# Altium PCB PCI short card universal - 32 BIT.PCBDOC (part 1 of 4)
Units mm, origin at the board's own origin, x right, y up, seen from the top; angles counter-clockwise.
Board outline 174.62 x 106.68 mm, 4 copper layers (TopLayer, MidLayer2, MidLayer3, BottomLayer); 200 components, 306 nets, 1120 pads, 510 vias.
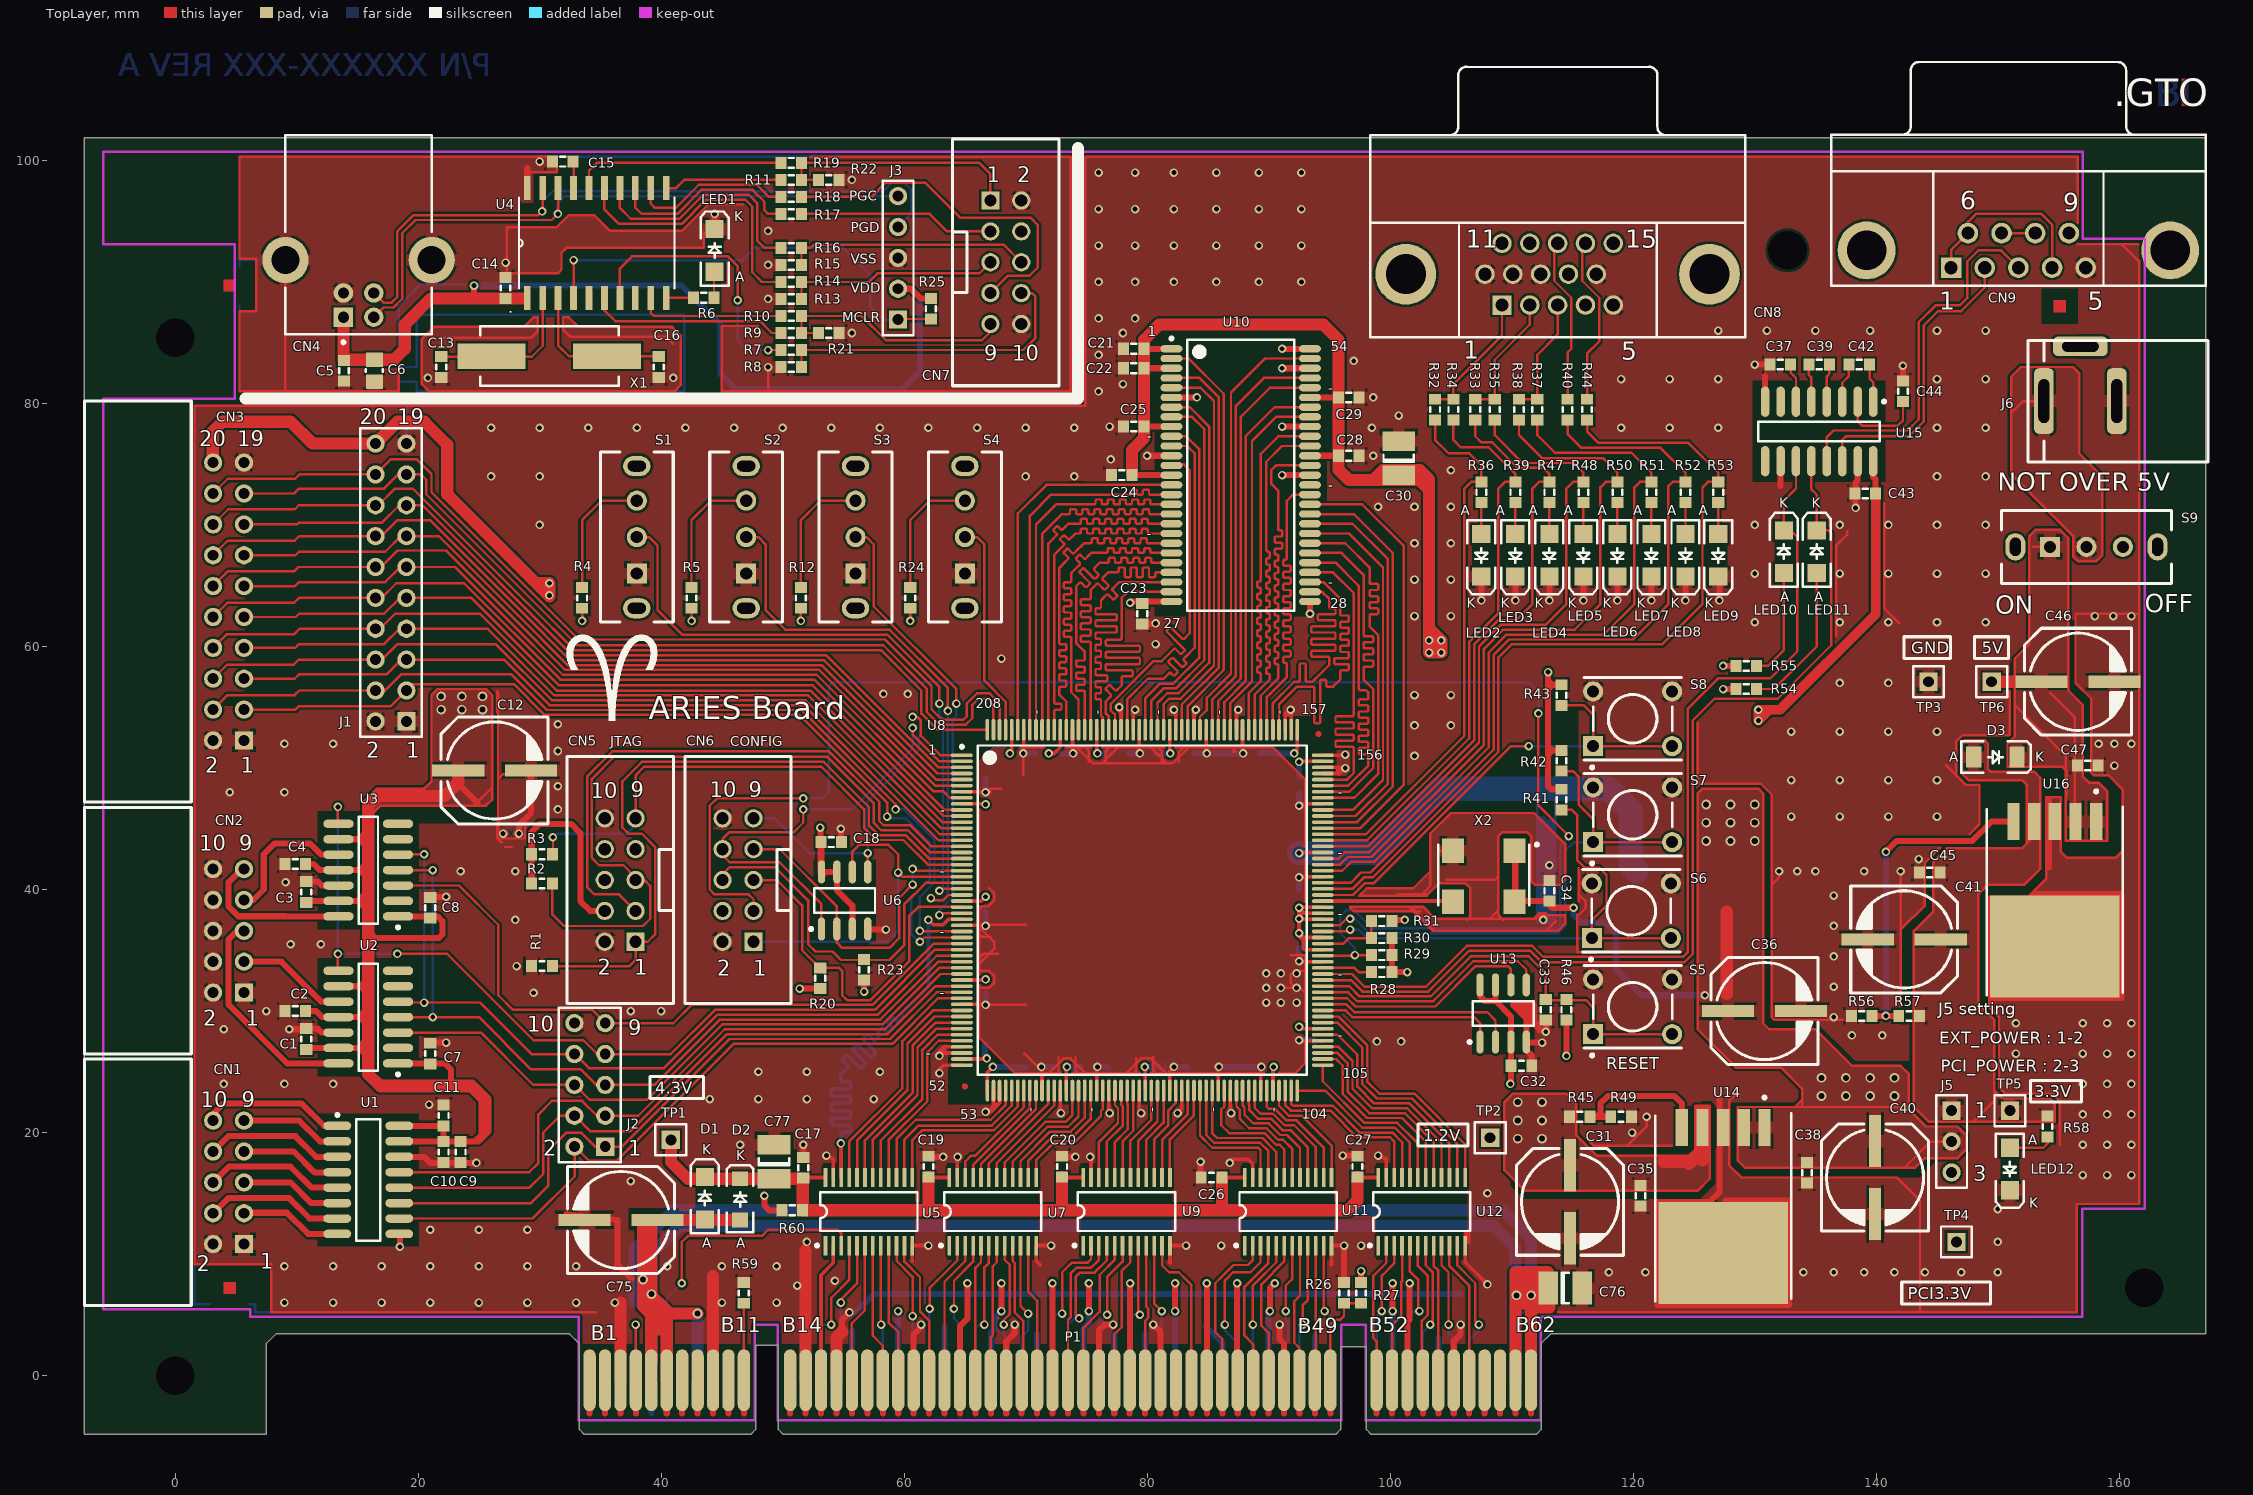
[diagram p0: TopLayer view]
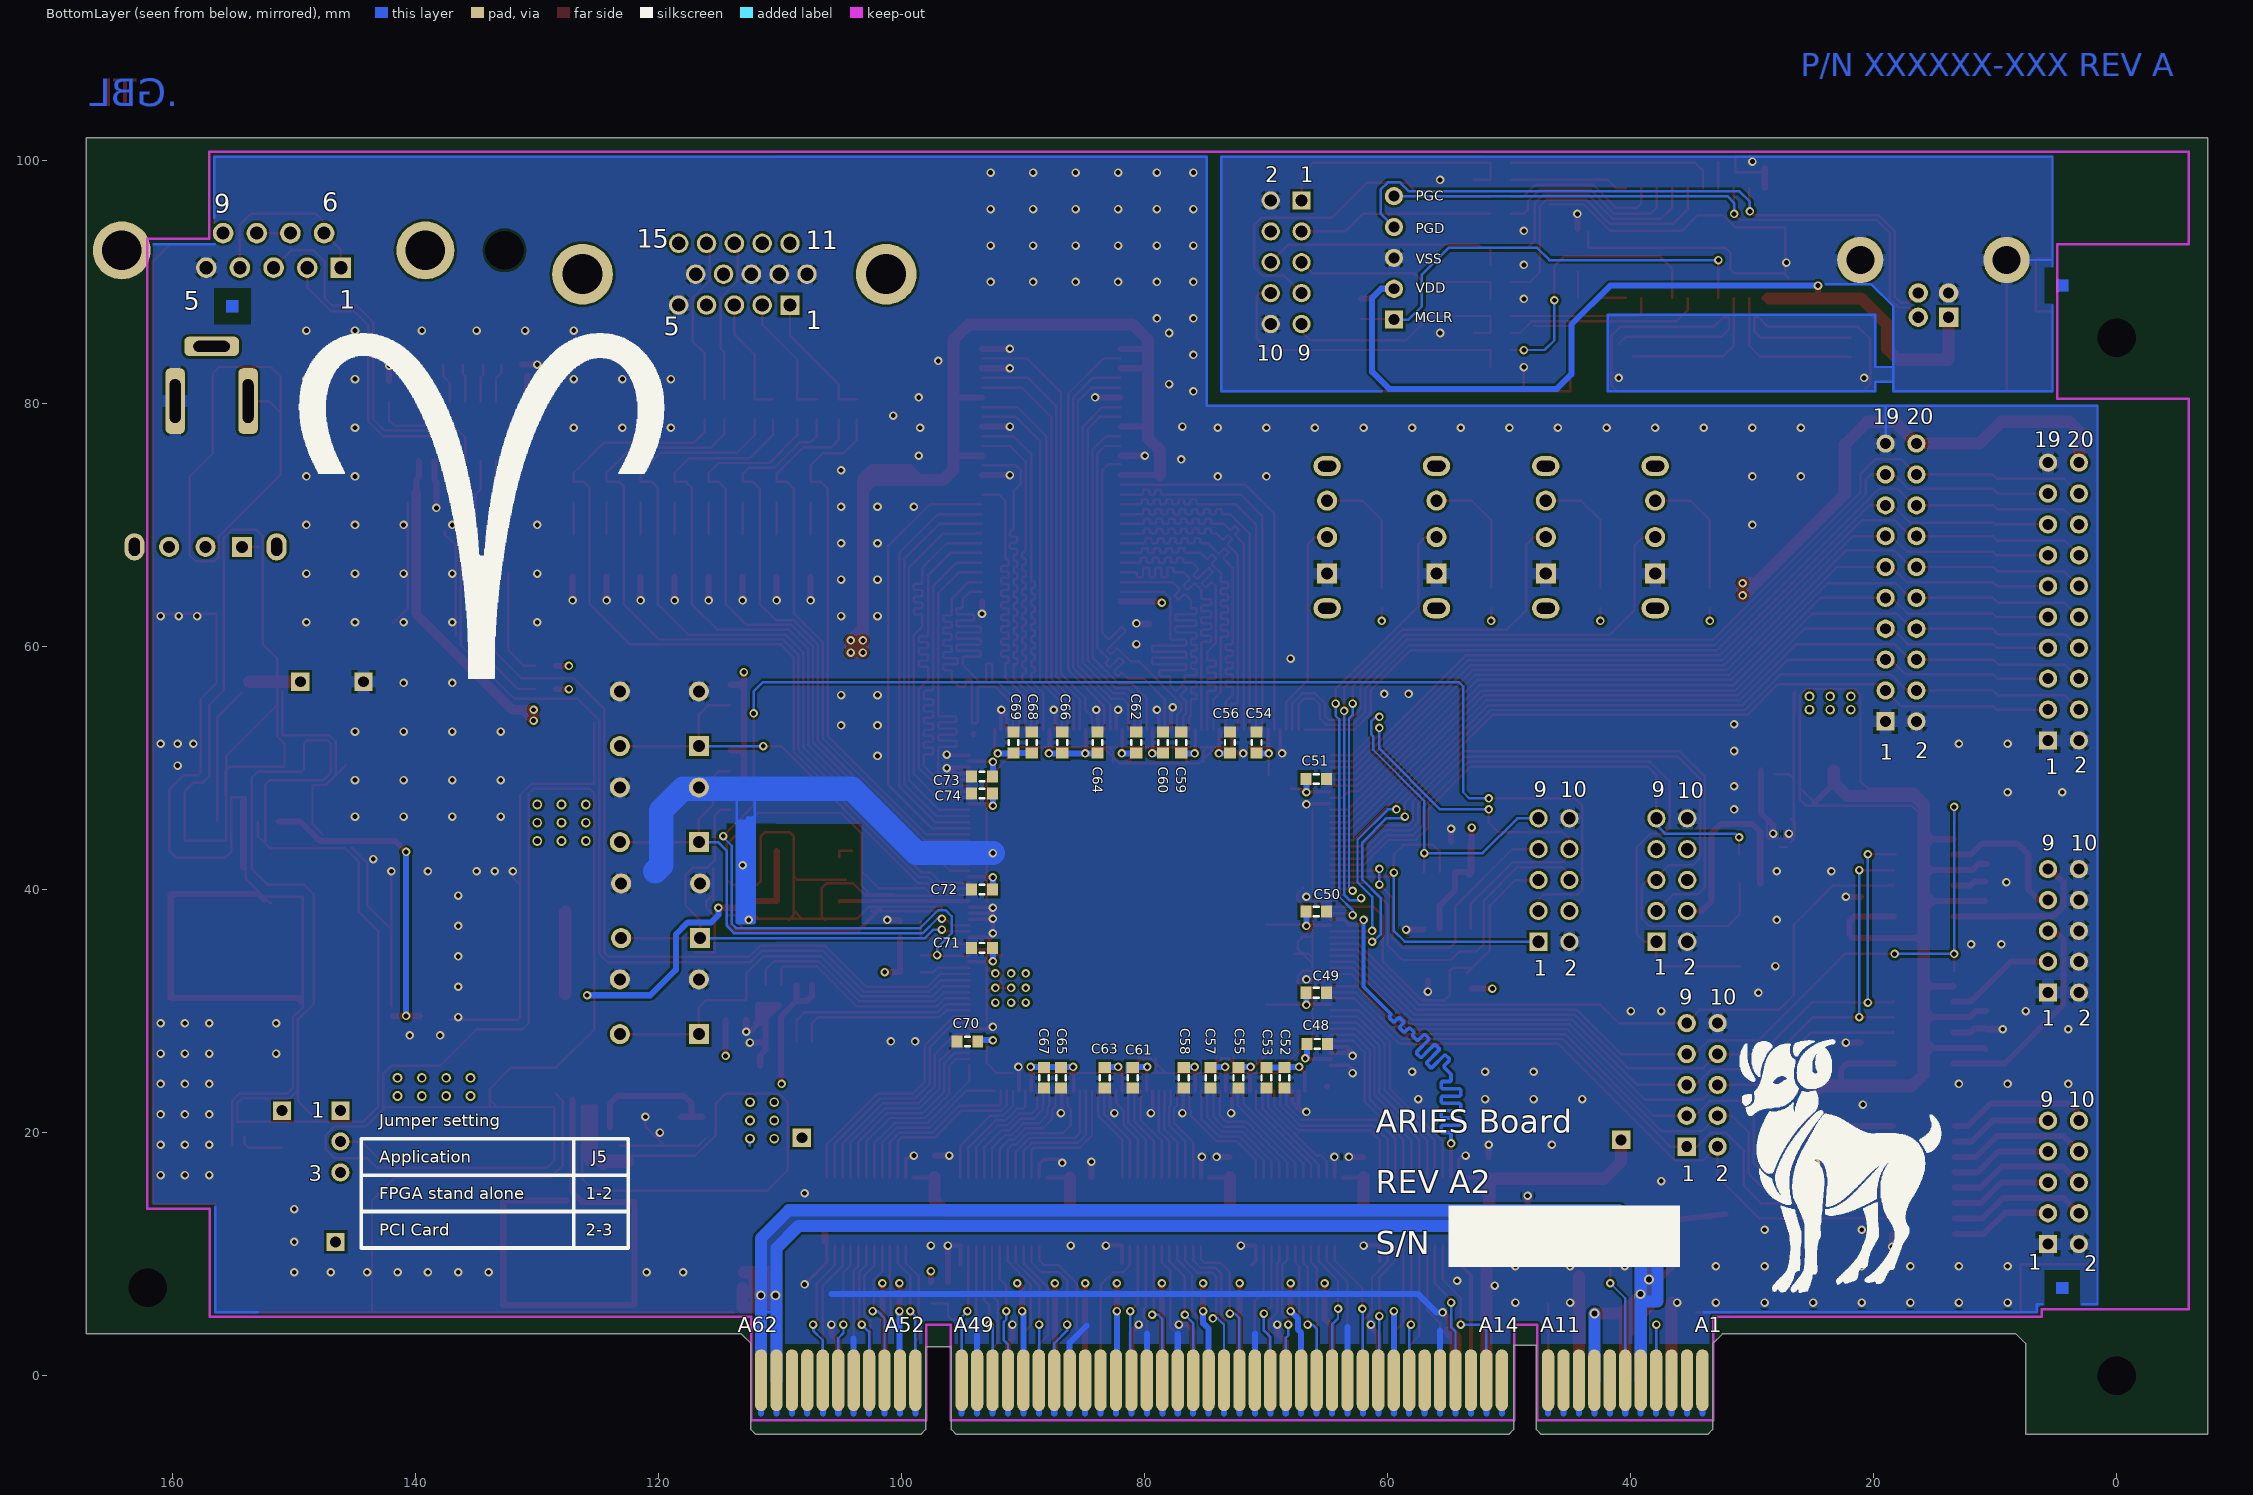
[diagram p1: BottomLayer view, seen from below]
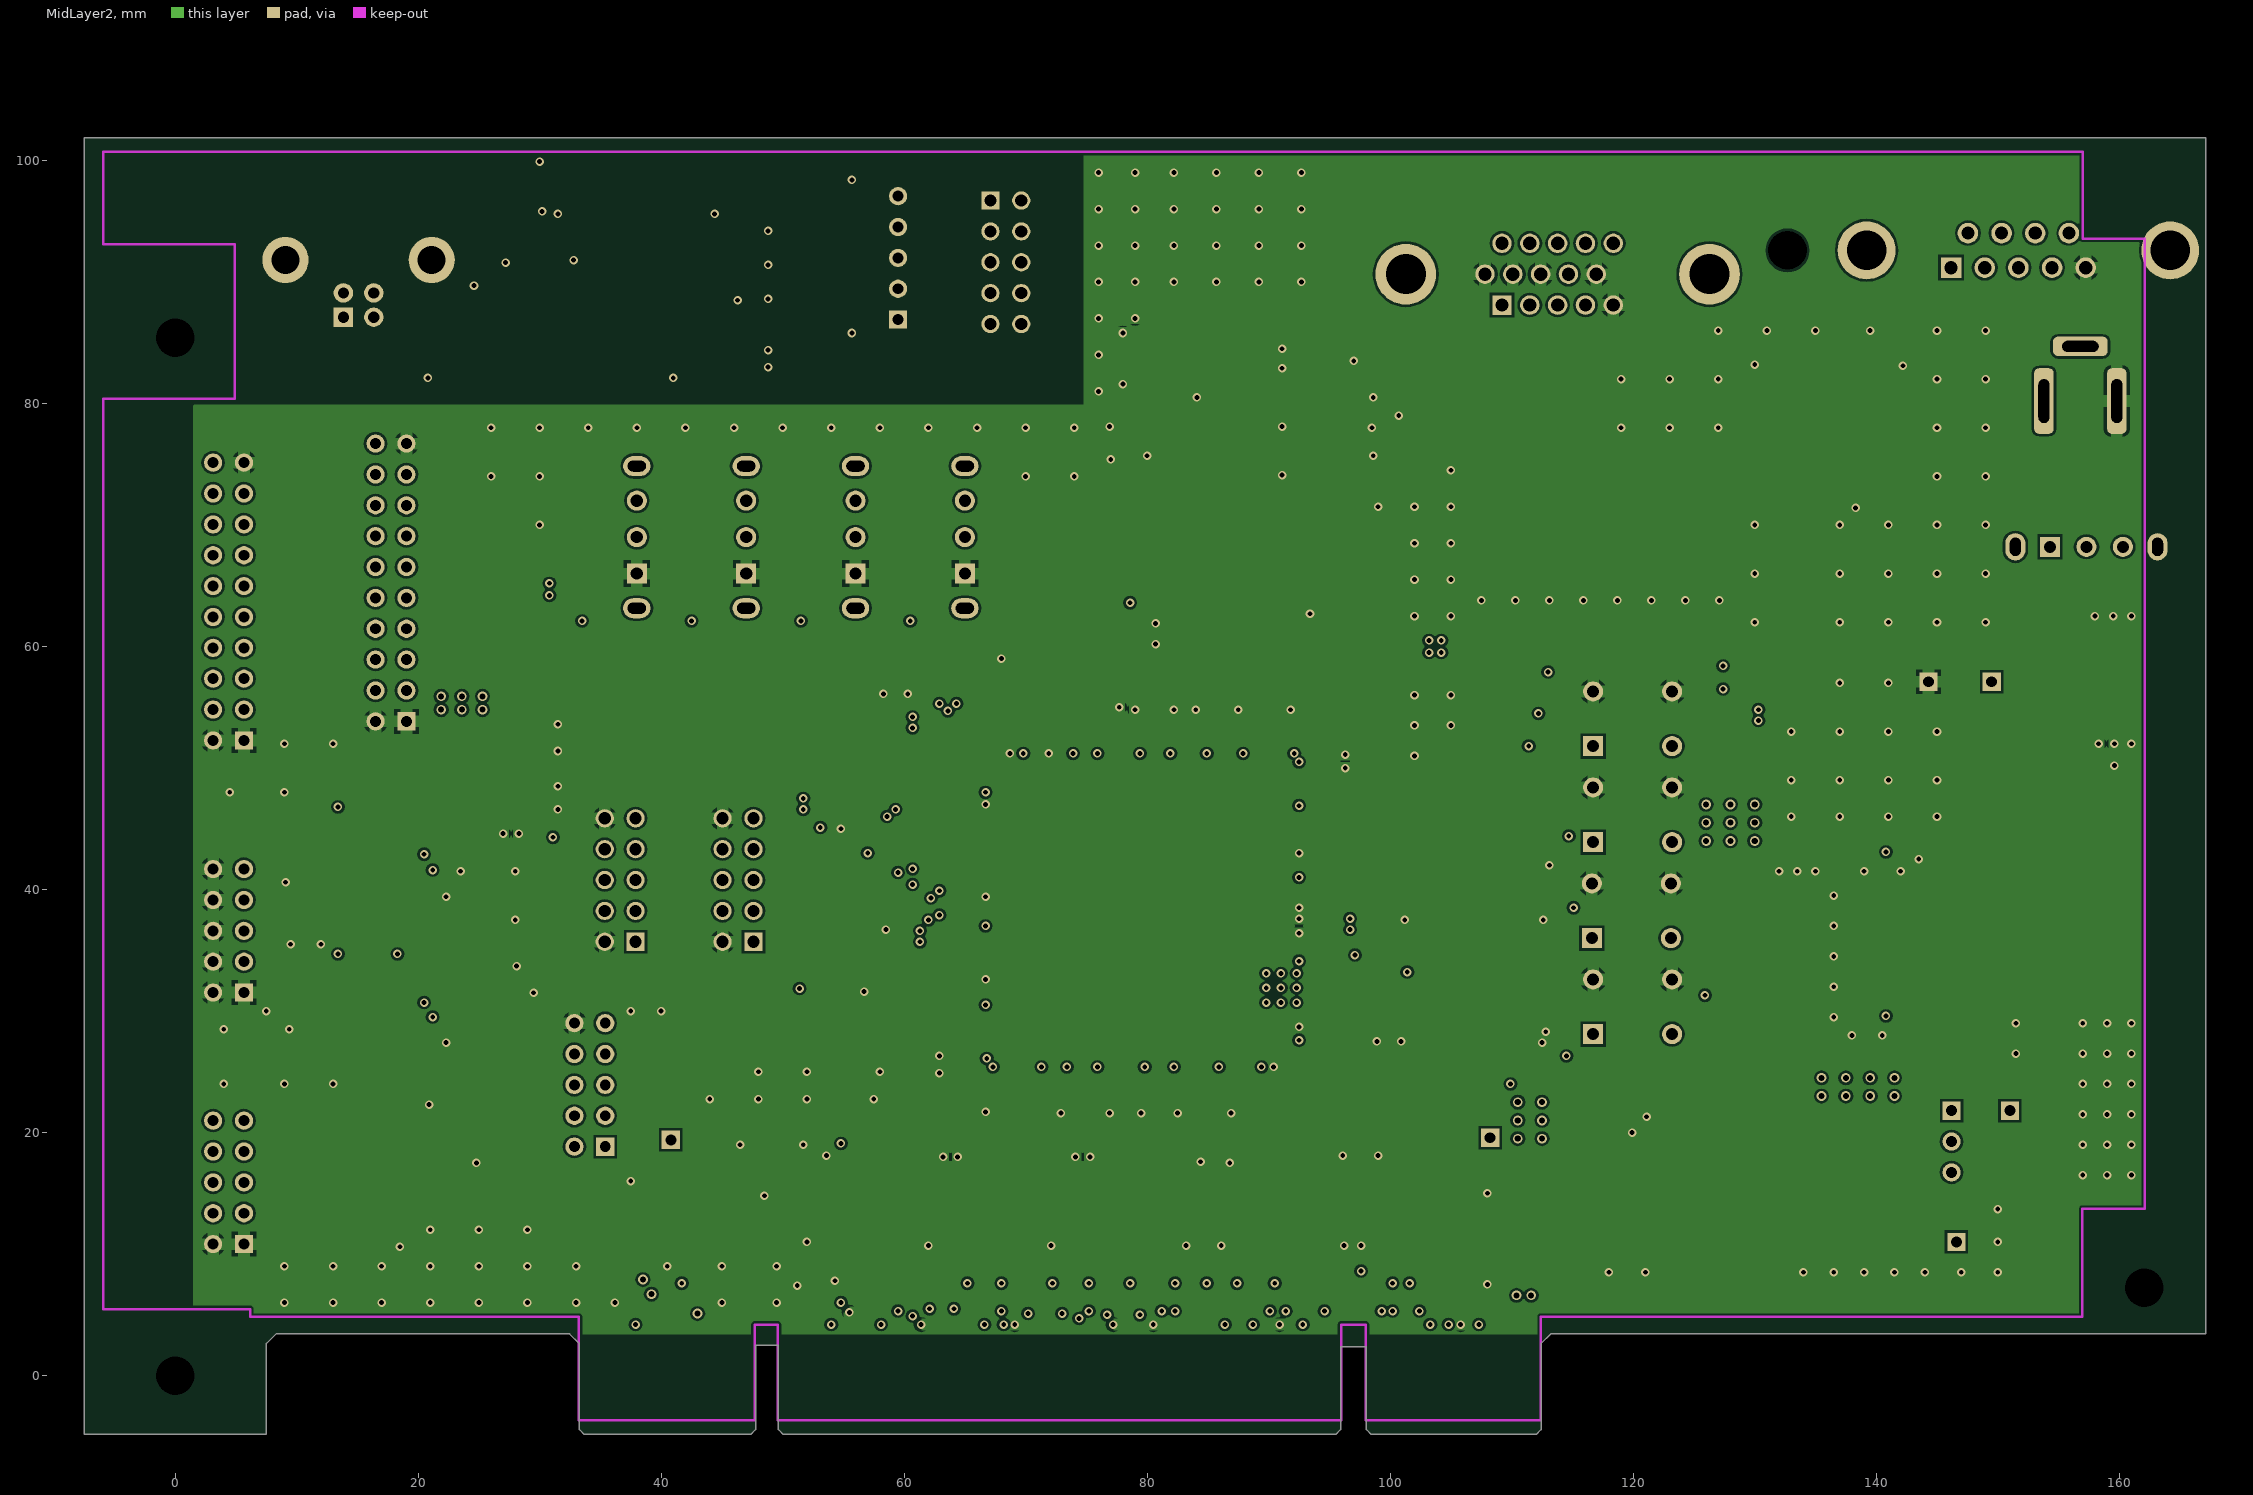
[diagram p2: MidLayer2]
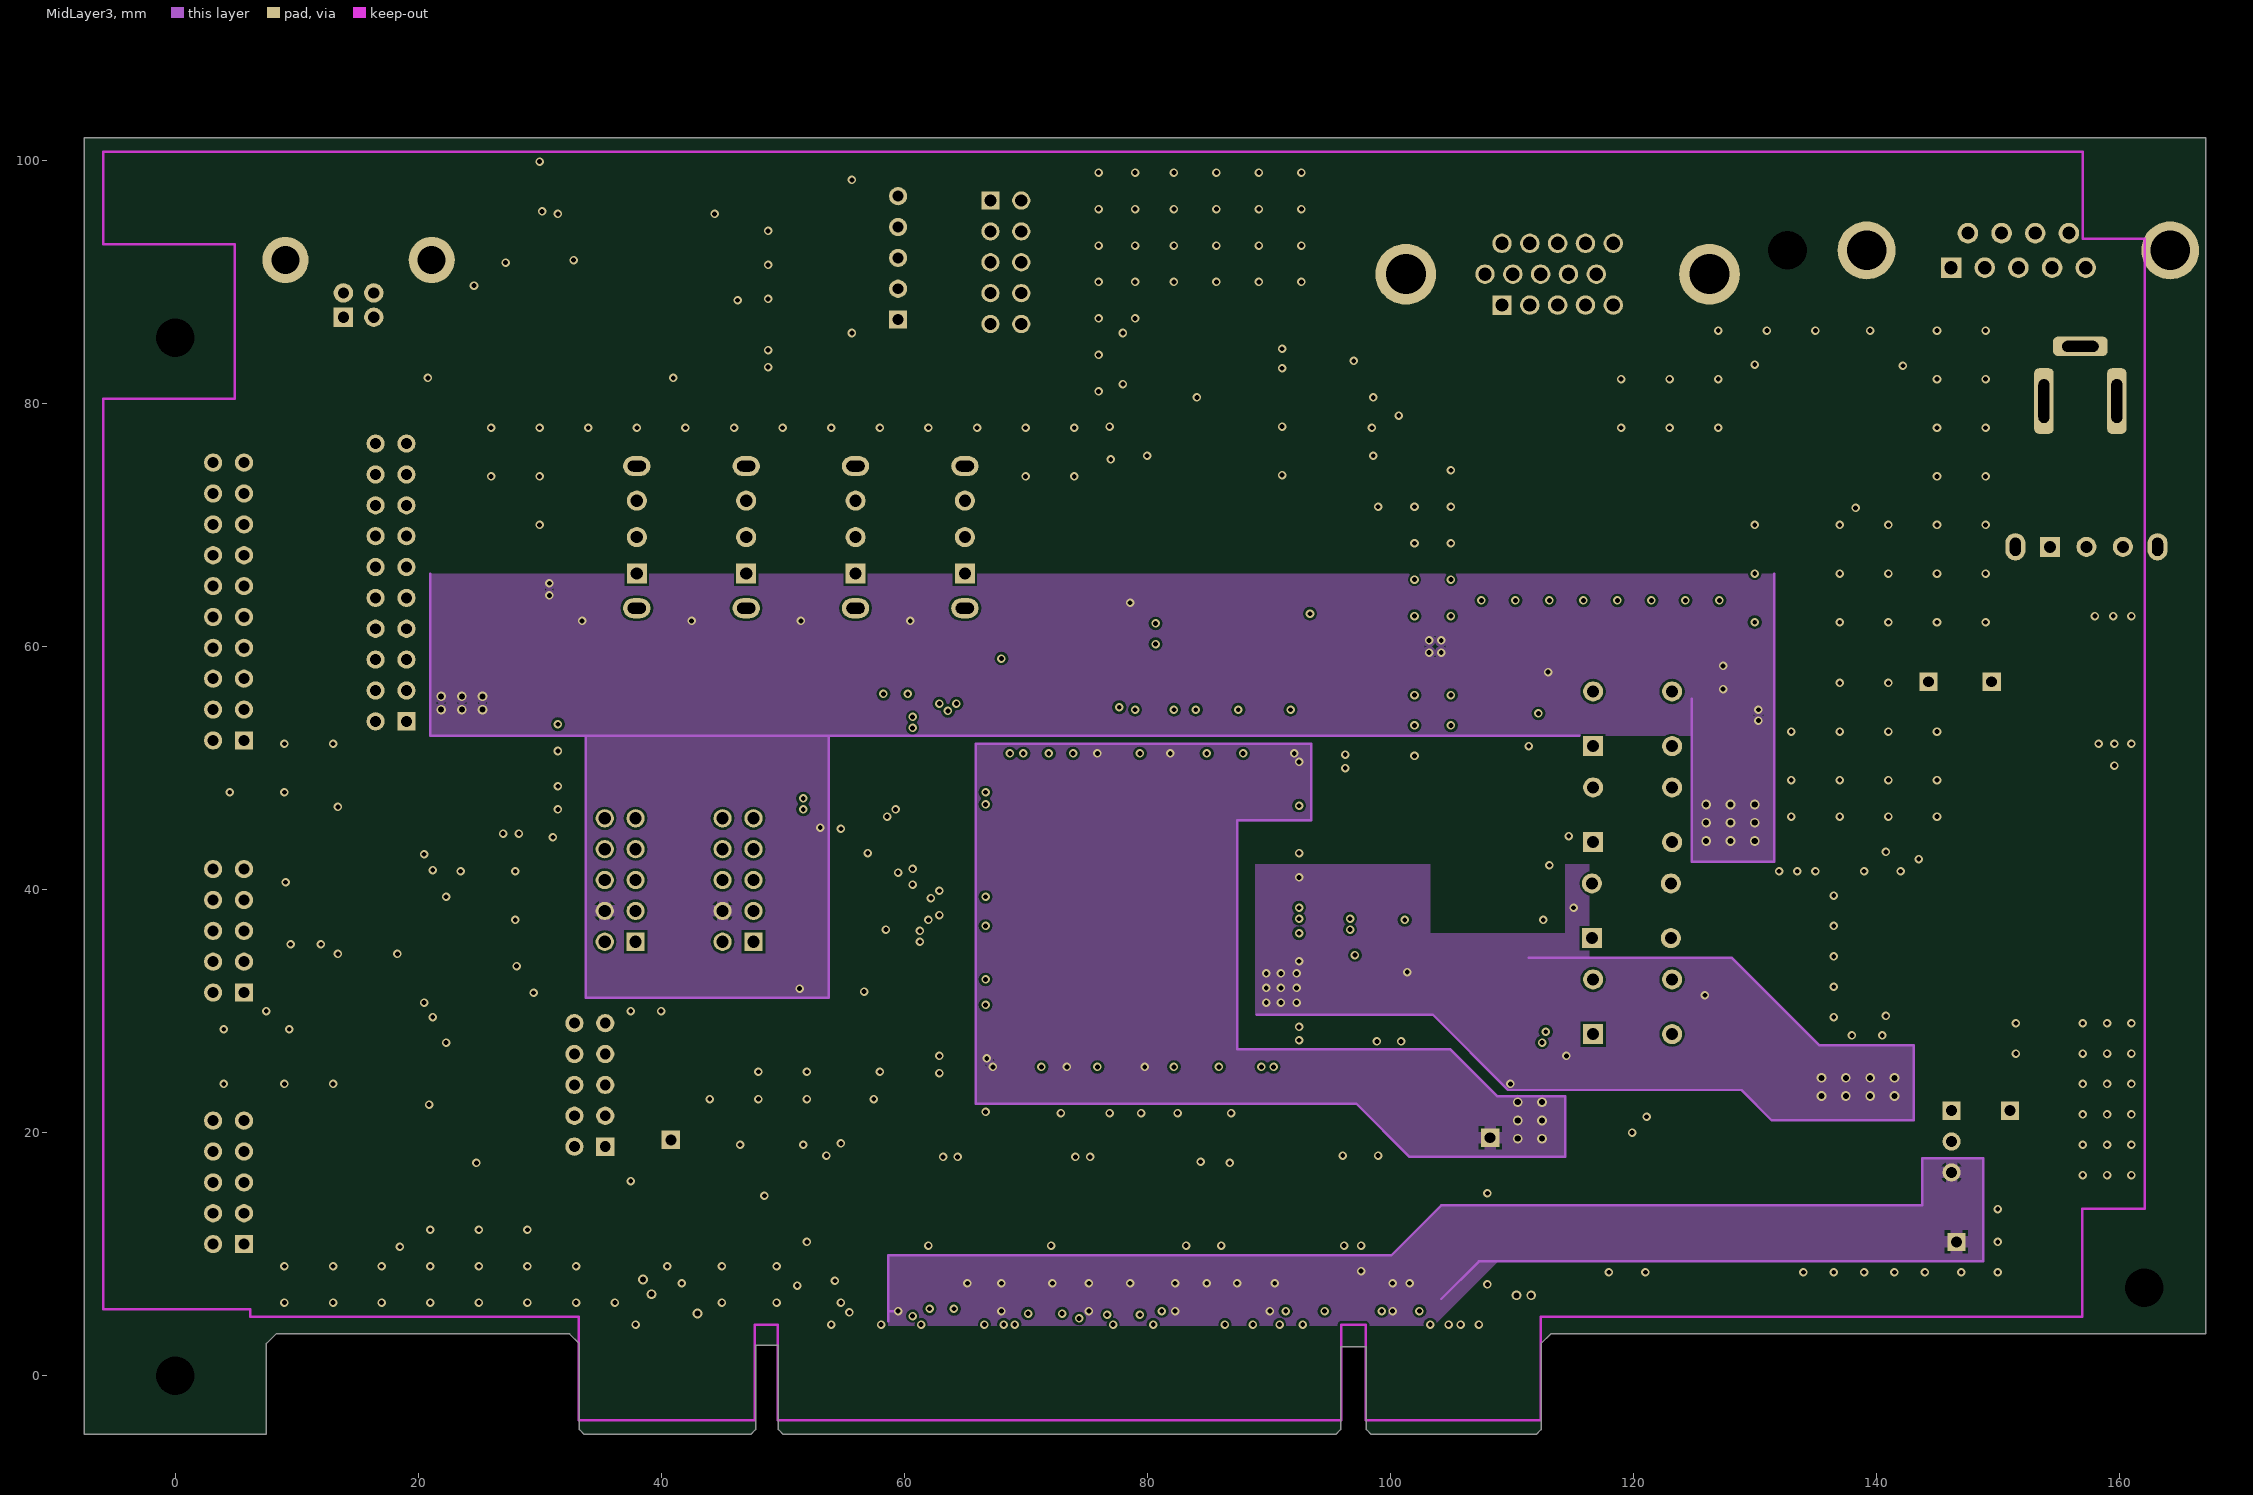
[diagram p3: MidLayer3]

## Layer stack, top to bottom
TopSolder: solder mask 0.0102, Solder Resist, Dk 3.5
TopLayer: signal copper 0.0356
Dielectric1: prepreg 0.32, FR-4, Dk 4.8
MidLayer2: signal copper 0.0356
Dielectric3: core 0.32, FR-4, Dk 4.8
MidLayer3: signal copper 0.036
Dielectric2: prepreg 0.32, FR-4, Dk 4.8
BottomLayer: signal copper 0.0356
BottomSolder: solder mask 0.0102, Solder Resist, Dk 3.5

## Board outline
-7.493,-4.826 7.518,-4.826 7.518,2.642 8.306,3.429 32.461,3.429 33.274,2.616 33.274,-4.445 33.655,-4.826 47.396,-4.826 47.777,-4.445 47.777,2.489 49.657,2.489 49.657,-4.445 50.038,-4.826 95.529,-4.826 95.91,-4.445 95.91,2.362 98.044,2.362 98.044,-4.445 98.425,-4.826 112.039,-4.826 112.42,-4.445 112.42,2.642 113.208,3.429 167.132,3.429 167.132,101.854 -7.493,101.854

## Design rules (kind name [scope] priority, off if disabled: settings)
Clearance [All] p1: gap=0.2 ignorepadtopadclearanceinfootprint=FALSE except(0: Arc-Hole Track-Hole SMDPad-Hole THPad-Hole Via-Hole Fill-Hole Poly-Hole Region-Hole Text-Hole)
ComponentClearance [All] p1: gap=0.1 collisioncheckmode=3 verticalgap=0.254 showdistances=FALSE
DiffPairsRouting [All] p1: maxlimit=0.254 minlimit=0.2 mostfreqgap=0.254 toplayer_prefgap=0.2 toplayer_minwidth=0.381 toplayer_maxwidth=0.381 toplayer_prefwidth=0.381 midlayer1_mingap=0.254 midlayer1_minwidth=0.381 midlayer1_maxwidth=0.381 midlayer1_prefwidth=0.381 midlayer2_mingap=0.254 midlayer2_minwidth=0.381 midlayer2_maxwidth=0.381 midlayer2_prefwidth=0.381 bottomlayer_prefgap=0.2 bottomlayer_minwidth=0.381 bottomlayer_maxwidth=0.381 bottomlayer_prefwidth=0.381 maxuncoupledlength=12.7
FabricationTestPointUsage TestPointUsage [All] p1: valid=0 allowmultiple=FALSE
FabricationTestpoint Testpoint [All] p1: side=3 testpointundercomponent=TRUE minsize=1.016 maxsize=2.54 preferedsize=1.524 minholesize=0.508 maxholesize=1.016 preferedholesize=0.813 testpointgrid=0.025 allowsidetop=TRUE allowsidebottom=TRUE usegrid=TRUE gridtolerance=0
HoleSize [All] p1: absolutevalues=TRUE maxlimit=2.54 minlimit=0.025 maxpercent=80.000 minpercent=20.000
PasteMaskExpansion PasteMaskExpansion_1 [InComponent('P1')] p1: expansion=-2.54
PasteMaskExpansion [All] p2: expansion=0
PlaneClearance [All] p1: clearance=0.254
PolygonConnect [All] p1: connectstyle=Relief reliefconductorwidth=1 reliefentries=4 polygonreliefangle="90 Angle" airgapwidth=0.254
RoutingVias [All] p1: holewidth=0.4 width=0.8 viastyle="Through Hole" minholewidth=0.4 minwidth=0.8 maxholewidth=0.711 maxwidth=1.27
SolderMaskExpansion [All] p1: expansion=0.051 istentingtop=FALSE
Width [All] p1: maxlimit=10 minlimit=0.2 preferedwidth=0.2
23 further rules are at their usual default settings.

## Classes and differential pairs
component class "PCI short card universal - 32 BIT": C17 C19 C20 C26 C27 C75 C76 C77 D1 D2 P1 R26 R27 R59 R60 TP1 U5 U7 U8 U9 U11 U12
component class "PCI short card universal - 32 BIT-7": C5 C6 C13 C14 C15 C16 CN4 CN7 J3 LED1 R6 R7 R8 R9 R10 R11 R13 R14 R15 R16 R17 R18 R19 R21 R22 R25 U4 X1
component class "PCI short card universal - 32 BIT-6": C1 C2 C3 C4 C7 C8 C9 C10 C11 C12 CN1 CN2 J2 U1 U2 U3
component class "PCI short card universal - 32 BIT-5": C32 C37 C39 C42 C43 C44 CN3 CN8 CN9 J1 LED2 LED3 LED4 LED5 LED6 LED7 LED8 LED9 LED10 LED11 R32 R33 R34 R35 R36 R37 R38 R39 R40 R44 R47 R48 R50 R51 R52 R53 R54 R55 U13 U15
component class "PCI short card universal - 32 BIT-4": C21 C22 C23 C24 C25 C28 C29 C30 U10
component class "PCI short card universal - 32 BIT-3": C31 C35 C36 C38 C40 C41 C45 C46 C47 C48 C49 C50 C51 C52 C53 C54 C55 C56 C57 C58 C59 C60 C61 C62 C63 C64 C65 C66 C67 C68 C69 C70 C71 C72 C73 C74 D3 J5 J6 JP1 LED12 R45 R49 R56 R57 R58 S9 TP2 TP3 TP4 TP5 TP6 U14 U16
component class "PCI short card universal - 32 BIT-2": C18 C33 C34 CN5 CN6 R1 R2 R3 R4 R5 R12 R20 R23 R24 R28 R29 R30 R31 R41 R42 R43 R46 S1 S2 S3 S4 S5 S6 S7 S8 U6 X2
differential pair PIC_D: +PIC_D_P -PIC_D_N

## Components (designator, comment, footprint, x,y, rotation, side; value= is the part's Value field where it differs from the comment)
C1 "Cap Semi" RESC1608N 10.8,27.7 r270 top
C2 "Cap Semi" RESC1608N 9.9,30 r0 top (schematic designator C3)
C3 "Cap Semi" RESC1608N 10.8,39.8 r270 top (schematic designator C7)
C4 "Cap Semi" RESC1608N 9.9,42.1 r0 top
C5 "Cap Semi" RESC1608N 13.9,82.7 r90 top (schematic designator C37)
C6 "Cap Semi" RESC2012N 16.4,82.7 r90 top (schematic designator C73)
C7 "Cap Semi" RESC1608N 21,26.5 r270 top (schematic designator C6)
C8 "Cap Semi" RESC1608N 21,38.5 r270 top (schematic designator C2)
C9 "Cap Semi" RESC1608N 23.5,18.4 r90 top (schematic designator C10)
C10 "Cap Semi" RESC1608N 22.1,18.4 r90 top (schematic designator C8)
C11 "Cap Semi" RESC1608N 22.1,21.4 r270 top (schematic designator C9)
C12 "Cap2" ECEL_D8 26.3,49.8 r90 top (schematic designator C5)
C13 "Cap Semi" RESC1608N 21.9,83 r90 top (schematic designator C38)
C14 "Cap Semi" RESC1608N 27.2,89.5 r270 top (schematic designator C35)
C15 "Cap Semi" RESC1608N 31.9,99.9 r0 top (schematic designator C34)
C16 "Cap Semi" RESC1608N 39.8,83 r90 top (schematic designator C30)
C17 "Cap Semi" RESC1608N 51.7,17.1 r270 top (schematic designator C70)
C18 "Cap Semi" RESC1608N 54,43.9 r180 top (schematic designator C19)
C19 "Cap Semi" RESC1608N 62,17.2 r270 top (schematic designator C56)
C20 "Cap Semi" RESC1608N 73,17.2 r270 top (schematic designator C71)
C21 "Cap Semi" RESC1608N 78.9,84.5 r0 top (schematic designator C27)
C22 "Cap Semi" RESC1608N 78.9,82.9 r0 top (schematic designator C23)
C23 "Cap Semi" RESC1608N 79.6,62.7 r90 top (schematic designator C25)
C24 "Cap Semi" RESC1608N 77.9,74.1 r0 top (schematic designator C26)
C25 "Cap Semi" RESC1608N 78.9,78.1 r0 top (schematic designator C20)
C26 "Cap Semi" RESC1608N 85.3,16.3 r0 top (schematic designator C52)
C27 "Cap Semi" RESC1608N 97.3,17.2 r270 top (schematic designator C72)
C28 "Cap Semi" RESC1608N 96.6,75.7 r180 top (schematic designator C29)
C29 "Cap Semi" RESC1608N 96.6,80.5 r180 top (schematic designator C22)
C30 "Cap Semi" CD3225-1210 100.7,75.5 r270 top (schematic designator C74)
C31 "Cap2" ECEL_D8 114.8,14.3 r0 top (schematic designator C21)
C32 "Cap Semi" RESC1608N 110.8,25.5 r180 top (schematic designator C11)
C33 "Cap Semi" RESC1608N 112.8,30.1 r90 top (schematic designator C18)
C34 "Cap Semi" RESC1608N 113.1,39.9 r270 top (schematic designator C17)
C35 "Cap Semi" RESC1608N 120.6,14.8 r90 top (schematic designator C24)
C36 "Cap2" ECEL_D8 130.8,30 r90 top (schematic designator C69)
C37 "Cap Semi" RESC1608N 132.1,83.2 r0 top (schematic designator C12)
C38 "Cap Semi" RESC1608N 134.3,16.7 r90 top (schematic designator C32)
C39 "Cap Semi" RESC1608N 135.3,83.2 r0 top (schematic designator C13)
C40 "Cap2" ECEL_D8 139.9,16.3 r0 top (schematic designator C28)
C41 "Cap2" ECEL_D8 142.3,35.9 r270 top (schematic designator C31)
C42 "Cap Semi" RESC1608N 138.6,83.2 r0 top (schematic designator C15)
C43 "Cap Semi" RESC1608N 139.1,72.6 r0 top (schematic designator C14)
C44 "Cap Semi" RESC1608N 142.2,81 r270 top (schematic designator C16)
C45 "Cap Semi" RESC1608N 144.4,41.4 r0 top (schematic designator C33)
C46 "Cap2" ECEL_D8 156.6,57.1 r90 top (schematic designator C39)
C47 "Cap Semi" RESC1608N 157.4,50.2 r180 top (schematic designator C36)
C48 "Cap Semi" RESC1608N 65.8,27.3 r0 bottom (schematic designator C50)
C49 "Cap Semi" RESC1608N 65.9,31.5 r0 bottom (schematic designator C51)
C50 "Cap Semi" RESC1608N 65.9,38.2 r0 bottom (schematic designator C55)
C51 "Cap Semi" RESC1608N 65.9,49.1 r0 bottom (schematic designator C59)
C52 "Cap Semi" RESC1608N 68.5,24.5 r90 bottom (schematic designator C48)
C53 "Cap Semi" RESC1608N 70,24.5 r90 bottom (schematic designator C43)
C54 "Cap Semi" RESC1608N 70.8,52.1 r270 bottom (schematic designator C44)
C55 "Cap Semi" RESC1608N 72.3,24.5 r90 bottom (schematic designator C62)
C56 "Cap Semi" RESC1608N 73,52.1 r270 bottom (schematic designator C45)
C57 "Cap Semi" RESC1608N 74.6,24.5 r90 bottom (schematic designator C68)
C58 "Cap Semi" RESC1608N 76.8,24.5 r90 bottom (schematic designator C63)
C59 "Cap Semi" RESC1608N 77,52.1 r270 bottom (schematic designator C58)
C60 "Cap Semi" RESC1608N 78.5,52.1 r270 bottom (schematic designator C46)
C61 "Cap Semi" RESC1608N 81,24.5 r90 bottom (schematic designator C41)
C62 "Cap Semi" RESC1608N 80.7,52.1 r270 bottom (schematic designator C40)
C63 "Cap Semi" RESC1608N 83.3,24.5 r90 bottom (schematic designator C64)
C64 "Cap Semi" RESC1608N 83.9,52.1 r270 bottom (schematic designator C42)
C65 "Cap Semi" RESC1608N 86.9,24.5 r90 bottom
C66 "Cap Semi" RESC1608N 86.8,52.1 r270 bottom (schematic designator C47)
C67 "Cap Semi" RESC1608N 88.3,24.5 r90 bottom (schematic designator C66)
C68 "Cap Semi" RESC1608N 89.3,52.1 r270 bottom (schematic designator C61)
C69 "Cap Semi" RESC1608N 90.8,52.1 r270 bottom (schematic designator C60)
C70 "Cap Semi" RESC1608N 94.6,27.5 r180 bottom (schematic designator C54)
C71 "Cap Semi" RESC1608N 93.4,35.2 r180 bottom (schematic designator C49)
C72 "Cap Semi" RESC1608N 93.4,40 r180 bottom (schematic designator C53)
C73 "Cap Semi" RESC1608N 93.4,49.3 r180 bottom (schematic designator C67)
C74 "Cap Semi" RESC1608N 93.4,47.9 r180 bottom (schematic designator C57)
C75 "Cap2" ECEL_D8 36.7,12.8 r270 top
C76 "Cap Semi" CD3225-1210 114.4,7.2 r180 top
C77 "Cap Semi" CD3225-1210 49.3,17.6 r270 top
CN1 "SCP10GR31/RH" SCP10GR31/RH 4.4,15.9 r270 top
CN2 "SCP10GR31/RH" SCP10GR31/RH 4.4,36.6 r270 top
CN3 "SCP20GR31/RH" SCP20GR31/RH 4.4,63.7 r270 top
CN4 "UDRB04FTWNY/RH" 1437106 15.1,88.1 r90 top locked (schematic designator CN122)
CN5 "SCP10GS31/RH" SCP10GS31/RH 37.9,35.7 r90 top locked (schematic designator CN7)
CN6 "SCP10GS31/RH" SCP10GS31/RH 47.6,35.7 r90 top locked (schematic designator CN9)
CN7 "SCP10GS31/RH" SCP10GS31/RH 67.1,96.7 r270 top (schematic designator CN11)
CN8 "Dsub-15-Female-HD" DB15-VGA-Female 109.2,88.1 r0 top
CN9 "DEL09SBNK2YS" DSUB1.385-2H9 151.7,102.1 r0 top (schematic designator CN33)
D1 "XXX(DNI)" LED3.2X1.6X1.1 43.6,14.6 r90 top (schematic designator D15)
D2 "MMSD701T1G" SOD-123 46.5,14.5 r90 top (schematic designator D14)
D3 "LL4148-TSC" SOD80C 149.8,50.9 r0 top (schematic designator D13)
J1 "Header 10X2(DNI)" HDR2X10 19.04,53.84 r90 top (schematic designator J44)
J2 "Header 5X2(DNI)" HDR2X5 35.4,18.84 r90 top (schematic designator J6)
J3 "Header 5(DNI)" HDR1X5 59.5,86.9 r90 top (schematic designator J10)
J5 "Header 3" HDR1X3 146.2,21.8 r270 top (schematic designator J12)
J6 "DS-012-B-PBT-ROHS" JACK 153.8,80.2 r90 top (schematic designator J4)
LED1 "LED2" LED3.2X1.6X1.1 44.4,92.6 r90 top (schematic designator LED22)
LED2 "LED2" LED3.2X1.6X1.1 107.5,67.5 r270 top (schematic designator LED4)
LED3 "LED2" LED3.2X1.6X1.1 110.3,67.5 r270 top (schematic designator LED5)
LED4 "LED2" LED3.2X1.6X1.1 113.1,67.5 r270 top (schematic designator LED6)
LED5 "LED2" LED3.2X1.6X1.1 115.9,67.5 r270 top (schematic designator LED7)
LED6 "LED2" LED3.2X1.6X1.1 118.7,67.5 r270 top (schematic designator LED8)
LED7 "LED2" LED3.2X1.6X1.1 121.5,67.5 r270 top (schematic designator LED9)
LED8 "LED2" LED3.2X1.6X1.1 124.3,67.5 r270 top (schematic designator LED10)
LED9 "LED2" LED3.2X1.6X1.1 127,67.5 r270 top (schematic designator LED11)
LED10 "LED2" LED3.2X1.6X1.1 132.4,67.8 r90 top (schematic designator LED12)
LED11 "LED2" LED3.2X1.6X1.1 135.1,67.8 r90 top (schematic designator LED13)
LED12 "LED2" LED3.2X1.6X1.1 151,17 r270 top (schematic designator LED44)
P1 "PCIUV32BIT(DNI)" PCIUV32BIT 34.112,-0.381 r0 top locked
R1 "Res3" RESC1608N 30.2,33.7 r180 top (schematic designator R29)
R2 "Res3" RESC1608N 30.2,40.5 r0 top (schematic designator R25)
R3 "Res3" RESC1608N 30.2,42.9 r0 top (schematic designator R24)
R4 "Res3" RESC1608N 33.5,64 r90 top (schematic designator R63)
R5 "Res3" RESC1608N 42.5,64 r90 top (schematic designator R19)
R6 "Res3" RESC1608N 43.5,88.7 r0 top (schematic designator R50)
R7 "Res3" RESC1608N 50.7,84.4 r180 top (schematic designator R51)
R8 "Res3" RESC1608N 50.7,83 r180 top (schematic designator R39)
R9 "Res3" RESC1608N 50.7,85.8 r180 top (schematic designator R53)
R10 "Res3" RESC1608N 50.7,87.2 r180 top (schematic designator R52)
R11 "Res3" RESC1608N 50.7,98.4 r180 top (schematic designator R56)
R12 "Res3" RESC1608N 51.5,64 r90 top (schematic designator R21)
R13 "Res3" RESC1608N 50.7,88.6 r180 top (schematic designator R43)
R14 "Res3" RESC1608N 50.7,90 r180 top (schematic designator R49)
R15 "Res3" RESC1608N 50.7,91.4 r180 top (schematic designator R42)
R16 "Res3" RESC1608N 50.7,92.8 r180 top (schematic designator R48)
R17 "Res3" RESC1608N 50.7,95.6 r180 top (schematic designator R47)
R18 "Res3" RESC1608N 50.7,97 r180 top (schematic designator R46)
R19 "Res3" RESC1608N 50.7,99.8 r180 top (schematic designator R57)
R20 "Res3" RESC1608N 53.1,32.7 r90 top (schematic designator R35)
R21 "Res3" RESC1608N 53.8,85.8 r0 top (schematic designator R40)
R22 "Res3" RESC1608N 53.8,98.4 r0 top (schematic designator R45)
R23 "Res3" RESC1608N 56.7,33.4 r270 top (schematic designator R33)
R24 "Res3" RESC1608N 60.5,64 r90 top (schematic designator R62)
R25 "Res3" RESC1608N 62.2,87.8 r270 top (schematic designator R34)
R26 "Res3" RESC1608N 96.2,6.8 r90 top (schematic designator R32)
R27 "Res3" RESC1608N 97.6,6.8 r270 top (schematic designator R30)
R28 "Res3" RESC1608N 99.3,33.2 r180 top (schematic designator R20)
R29 "Res3" RESC1608N 99.3,34.6 r180 top (schematic designator R36)
R30 "Res3" RESC1608N 99.3,36 r180 top (schematic designator R18)
R31 "Res3" RESC1608N 99.3,37.4 r0 top (schematic designator R17)
R32 "Res3" RESC1608N 103.7,79.5 r90 top (schematic designator R34)
R33 "Res3" RESC1608N 107,79.5 r90 top (schematic designator R3)
R34 "Res3" RESC1608N 105.2,79.5 r90 top (schematic designator R33)
R35 "Res3" RESC1608N 108.6,79.5 r90 top (schematic designator R5)
R36 "Res3" RESC1608N 107.5,72.7 r270 top (schematic designator R6)
R37 "Res3" RESC1608N 112.1,79.5 r90 top (schematic designator R39)
R38 "Res3" RESC1608N 110.6,79.5 r90 top (schematic designator R4)
R39 "Res3" RESC1608N 110.3,72.7 r270 top (schematic designator R40)
R40 "Res3" RESC1608N 114.6,79.5 r90 top (schematic designator R48)
R41 "Res3" RESC1608N 114.1,47.4 r270 top (schematic designator R42)
R42 "Res3" RESC1608N 114.1,50.6 r270 top (schematic designator R43)
R43 "Res3" RESC1608N 114.1,56 r270 top (schematic designator R41)
R44 "Res3" RESC1608N 116.2,79.5 r90 top (schematic designator R11)
R45 "Res3" RESC1608N 115.6,21.3 r0 top (schematic designator R43)
R46 "Res3" RESC1608N 114.5,30.1 r90 top (schematic designator R44)
R47 "Res3" RESC1608N 113.1,72.7 r270 top (schematic designator R46)
R48 "Res3" RESC1608N 115.9,72.7 r270 top (schematic designator R57)
R49 "Res3" RESC1608N 119,21.3 r0 top (schematic designator R47)
R50 "Res3" RESC1608N 118.7,72.7 r270 top (schematic designator R49)
R51 "Res3" RESC1608N 121.5,72.7 r270 top (schematic designator R50)
R52 "Res3" RESC1608N 124.3,72.7 r270 top (schematic designator R51)
R53 "Res3" RESC1608N 127,72.7 r270 top (schematic designator R52)
R54 "Res3" RESC1608N 129.3,56.5 r0 top (schematic designator R53)
R55 "Res3" RESC1608N 129.3,58.4 r0 top (schematic designator R59)
R56 "Res3" RESC1608N 138.8,29.6 r180 top (schematic designator R54)
R57 "Res3" RESC1608N 142.7,29.6 r180 top (schematic designator R55)
R58 "Res3" RESC1608N 154.1,20.5 r270 top (schematic designator R56)
R59 "Res3" RESC1608N 46.8,6.8 r90 top
R60 "Res3" RESC1608N 50.8,13.6 r180 top
S1 "SS-12F45-G8-ROHS" SLIDE_SW_2TYPE 38,69 r90 top (schematic designator S8)
S2 "SS-12F45-G8-ROHS" SLIDE_SW_2TYPE 47,69 r90 top (schematic designator S3)
S3 "SS-12F45-G8-ROHS" SLIDE_SW_2TYPE 56,69 r90 top (schematic designator S1)
S4 "SS-12F45-G8-ROHS" SLIDE_SW_2TYPE 65,69 r90 top (schematic designator S7)
S5 "TC-0103-X-ROHS" "TACK_SW 6x6mm" 116.7,28.1 r0 top
S6 "TC-0103-X-ROHS" "TACK_SW 6x6mm" 116.6,36 r0 top (schematic designator S4)
S7 "TC-0103-X-ROHS" "TACK_SW 6x6mm" 116.7,43.9 r0 top (schematic designator S2)
S8 "TC-0103-X-ROHS" "TACK_SW 6x6mm" 116.7,51.8 r0 top (schematic designator S9)
S9 "SS-12F45-G8-ROHS" SLIDE_SW_2TYPE 157.3,68.2 r0 top (schematic designator S6)
TP1 "TestPoint" HDR1X1 40.8,19.4 r0 top (schematic designator TP8)
TP2 "TestPoint" HDR1X1 108.229,19.571 r0 top (schematic designator TP13)
TP3 "TestPoint" HDR1X1 144.3,57.1 r0 top (schematic designator TP15)
TP4 "TestPoint" HDR1X1 146.6,11 r0 top (schematic designator TP16)
TP5 "TestPoint" HDR1X1 151,21.8 r0 top (schematic designator TP17)
TP6 "TestPoint" HDR1X1 149.5,57.1 r0 top (schematic designator TP18)
U1 "MCP3304-CI/SL" MCP3304-CI/SL 15.9,16.1 r0 top (schematic designator U3)
U2 "MCP4922-E/SL" MCP4922-E/SL 15.9,29.5 r180 top (schematic designator U1)
U3 "MCP4922-E/SL" MCP4922-E/SL 15.9,41.6 r180 top (schematic designator U2)
U4 "PIC18F14K50-I/SO" PIC18F14K50-SO 34.7,93.2 r90 top locked (schematic designator U10)
U5 "IDTQS3861PAG" TSSOP24(QS3681) 57.1,13.5 r0 top (schematic designator U6)
U6 "EPCS1SI8" SOIC8_L 55.1,39.1 r90 top (schematic designator U7)
U7 "IDTQS3861PAG" TSSOP24(QS3681) 67.3,13.5 r0 top
U8 "EP2C5Q208C8" PQFP208_N 79.6,38.3 r0 top locked (schematic designator U6)
U9 "IDTQS3861PAG" TSSOP24(QS3681) 78.3,13.5 r0 top
U10 "MT48LC16M16A2TG-75" TSOP2-54_M 87.7,74.1 r0 top locked (schematic designator U8)
U11 "IDTQS3861PAG" TSSOP24(QS3681) 91.6,13.5 r0 top
U12 "IDTQS3861PAG" TSSOP24(QS3681) 102.6,13.5 r0 top
U13 "EPCS1SI8" SOIC8_L 109.3,29.8 r90 top (schematic designator U4)
U14 "NCP5663DSADJR4G" D2PAK(936AA) 130.8,20.4 r90 top (schematic designator U9)
U15 "ICL3232CBNZ" NSO16_M 135.3,77.7 r270 top (schematic designator U5)
U16 "NCP5663DSADJR4G" D2PAK(936AA) 158.1,45.6 r90 top (schematic designator U11)
X1 "SMD49S-12M1630F" ABLS-25.000MHZ-B2F-T 30.8,83.9 r0 top (schematic designator X2)
X2 "CWX823-50.0M" CWX823-50.0M 107.7,41.1 r180 top (schematic designator X1)

## Footprints (in the part's own frame and the unit in brackets; to place one, negate y for a bottom-side part, rotate by r counter-clockwise, add the part's x,y. Pads: shape width x height; smd on the part's side, far side on the other; paste and mask are expansions set on the pad)
1437106 [mm] "Connector; USB1.1, Type B, Thru-Hole; 4 Position; Right Angle"
  rect 1.6x1.6 hole 0.92: 1(-1,1.25)
  round 1.6 hole 0.92: 2(-1,-1.25) 3(1,-1.25) 4(1,1.25)
  round 3.8 hole 2.3: 5(3.71,6.02) 6(3.71,-6.02)
  silkscreen extent -3.18,-6.02 13.99,6.02
ABLS-25.000MHZ-B2F-T [mm]
  rect 5.6x2.1 smd: 1(-4.75,0) 2(4.75,0)
  silkscreen extent -5.7,-2.45 5.7,2.45
CD3225-1210 [mm] "Chip Diode; Body 3.2 x 2.5 mm (LxW typ)"
  rect 1.6x2.7 smd: 1(-1.4,0) 2(1.4,0)
  TopLayer pour cut-out: 0.9,1.4 0.9,-1.4 -0.9,-1.4 -0.9,1.4
  silkscreen extent -0.3,-1.25 0.3,1.25
CWX823-50.0M [mm]
  rect 1.8x2 smd: 1(-2.54,-2.1) 2(2.54,-2.1) 3(2.54,2.1) 4(-2.54,2.1)
  silkscreen extent -4.49,-2.72 3.76,2.4
D2PAK(936AA) [mm]
  rect 3.05x1.016 smd: 1(0,0) 2(0,1.7) 3(0,3.4) 4(0,5.1) 5(0,6.8)
  rect 8.38x10.66 smd: 6(-10.3,3.4)
  silkscreen extent -14.3,-2.2 2.6,9
DB15-VGA-Female [mm] "High density D sub 15 pin Female connector"
  rect 1.6x1.6 hole 1.1: 1(0,0)
  round 1.6 hole 1.1: 2(2.29,0) 3(4.58,0) 4(6.87,0) 5(9.16,0) 6(-1.4,2.54) 7(0.89,2.54) 8(3.18,2.54) 9(5.47,2.54) 10(7.76,2.54) 11(0,5.08) 12(2.29,5.08) 13(4.58,5.08) 14(6.87,5.08) 15(9.16,5.08)
  round 5 hole 3.3: 16(-7.915,2.54) 17(17.075,2.54)
  silkscreen extent -10.83,-2.65 20.01,19.61
DSUB1.385-2H9 [mm] "Connector; D Subminiature; 9 Position; Right Angle; Pitch 1.385 mm"
  rect 1.69x1.69 hole 1.09: 1(-5.54,-10.92)
  round 1.69 hole 1.09: 2(-2.77,-10.92) 3(0,-10.92) 4(2.77,-10.92) 5(5.54,-10.92) 6(-4.155,-8.08) 7(-1.385,-8.08) 8(1.385,-8.08) 9(4.155,-8.08)
  round 4.76 hole 3.26: 10(-12.495,-9.5) 11(12.495,-9.5)
  silkscreen extent -15.4,-12.4 15.4,6
ECEL_D8 [mm] "CAP ELECT 8MM DIAMETER"
  rect 1x4.3 smd: 1(0,3) 2(0,-3)
  silkscreen extent -4.4,-4.4 4.4,4.4
HDR1X1 [mm]
  rect 1.5x1.5 hole 0.9: 1(0,0)
  silkscreen extent -1.27,-1.27 1.27,1.27
HDR1X3 [mm] "Connector; Header; 3 Position"
  rect 1.5x1.5 hole 0.9: 1(0,0)
  round 1.5 hole 0.9: 2(2.54,0) 3(5.08,0)
  silkscreen extent -1.27,-1.27 6.35,1.27
HDR1X5 [mm] "Connector; Header; 5 Position"
  rect 1.5x1.5 hole 0.9: 1(0,0)
  round 1.5 hole 0.9: 2(2.54,0) 3(5.08,0) 4(7.62,0) 5(10.16,0)
  silkscreen extent -1.27,-1.27 11.43,1.27
HDR2X5 [mm] "Connector; Header; 5x2 Position"
  rect 1.5x1.5 hole 0.9: 1(0,0)
  round 1.5 hole 0.9: 2(0,2.54) 3(2.54,0) 4(2.54,2.54) 5(5.08,0) 6(5.08,2.54) 7(7.62,0) 8(7.62,2.54) 9(10.16,0) 10(10.16,2.54)
  silkscreen extent -1.27,-1.27 11.43,3.81
HDR2X10 [mm] "Connector; Header; 10x2 Position"
  rect 1.5x1.5 hole 0.9: 1(0,0)
  round 1.5 hole 0.9: 2(0,2.54) 3(2.54,0) 4(2.54,2.54) 5(5.08,0) 6(5.08,2.54) 7(7.62,0) 8(7.62,2.54) 9(10.16,0) 10(10.16,2.54) 11(12.7,0) 12(12.7,2.54) 13(15.24,0) 14(15.24,2.54) 15(17.78,0) 16(17.78,2.54) 17(20.32,0) 18(20.32,2.54) 19(22.86,0) 20(22.86,2.54)
  silkscreen extent -1.27,-1.27 24.13,3.81
JACK [mm]
  rrect50% 1.6x4.5 hole 0.9 slot 3 at 90 deg: 0(4.5,-3)
  rrect50% 5.4x1.6 hole 0.9 slot 3.6 at 0 deg: 1(0,0) 2(0,-6)
  silkscreen extent -5,-13.5 5,1.3
LED3.2X1.6X1.1 [mm] "SMT LED; 2 Flat Leads"
  rect 1.5x1.5 smd: 1(-1.75,0) 2(1.75,0)
  TopLayer pour cut-out: -1.2,0.8 -1.2,-0.8 1.2,-0.8 1.2,0.8
  silkscreen extent -2.9,-1.15 3.2,1.15
MCP3304-CI/SL [mm]
  oval 2.3x0.7 smd: 1(-2.55,4.445) 2(-2.55,3.175) 3(-2.55,1.905) 4(-2.55,0.635) 5(-2.55,-0.635) 6(-2.55,-1.905) 7(-2.55,-3.175) 8(-2.55,-4.445) 9(2.55,-4.445) 10(2.55,-3.175) 11(2.55,-1.905) 12(2.55,-0.635) 13(2.55,0.635) 14(2.55,1.905) 15(2.55,3.175) 16(2.55,4.445)
  silkscreen extent -2.67,-5 1,5.47, body extent -2,-5 2,5, height 1.73
MCP4922-E/SL [mm]
  oval 2.5x0.7 smd: 1(-2.45,3.81) 2(-2.45,2.54) 3(-2.45,1.27) 4(-2.45,0) 5(-2.45,-1.27) 6(-2.45,-2.54) 7(-2.45,-3.81) 8(2.45,-3.81) 9(2.45,-2.54) 10(2.45,-1.27) 11(2.45,0) 12(2.45,1.27) 13(2.45,2.54) 14(2.45,3.81)
  silkscreen extent -2.57,-4.4 0.8,4.83, body extent -2,-4.38 2,4.38, height 1.75
NSO16_M [mm] "SOIC, 16-Leads, Body 9.9x3.9mm, Pitch 1.27mm, IPC Low Density"
  oval 2.5x0.7 smd: 1(-2.45,4.445) 2(-2.45,3.175) 3(-2.45,1.905) 4(-2.45,0.635) 5(-2.45,-0.635) 6(-2.45,-1.905) 7(-2.45,-3.175) 8(-2.45,-4.445) 9(2.45,-4.445) 10(2.45,-3.175) 11(2.45,-1.905) 12(2.45,-0.635) 13(2.45,0.635) 14(2.45,1.905) 15(2.45,3.175) 16(2.45,4.445)
  silkscreen extent -2.57,-5 0.8,5.47, body extent -2,-5 2,5, height 1.75
PCIUV32BIT [mil]
  oval 40x200 smd far side: A1(0,0) A2(50,0) A3(100,0) A4(150,0) A5(200,0) A6(250,0) A7(300,0) A8(350,0) A9(400,0) A10(450,0) A11(500,0) A14(650,0) A15(700,0) A16(750,0) A17(800,0) A18(850,0) A19(900,0) A20(950,0) A21(1000,0) A22(1050,0) A23(1100,0) A24(1150,0) A25(1200,0) A26(1250,0) A27(1300,0) A28(1350,0) A29(1400,0) A30(1450,0) A31(1500,0) A32(1550,0) A33(1600,0) A34(1650,0) A35(1700,0) A36(1750,0) A37(1800,0) A38(1850,0) A39(1900,0) A40(1950,0) A41(2000,0) A42(2050,0) A43(2100,0) A44(2150,0) A45(2200,0) A46(2250,0) A47(2300,0) A48(2350,0) A49(2400,0) A52(2550,0) A53(2600,0) A54(2650,0) A55(2700,0) A56(2750,0) A57(2800,0) A58(2850,0) A59(2900,0) A60(2950,0) A61(3000,0) A62(3050,0)
  oval 40x200 smd: B1(0,0) B2(50,0) B3(100,0) B4(150,0) B5(200,0) B6(250,0) B7(300,0) B8(350,0) B9(400,0) B10(450,0) B11(500,0) B14(650,0) B15(700,0) B16(750,0) B17(800,0) B18(850,0) B19(900,0) B20(950,0) B21(1000,0) B22(1050,0) B23(1100,0) B24(1150,0) B25(1200,0) B26(1250,0) B27(1300,0) B28(1350,0) B29(1400,0) B30(1450,0) B31(1500,0) B32(1550,0) B33(1600,0) B34(1650,0) B35(1700,0) B36(1750,0) B37(1800,0) B38(1850,0) B39(1900,0) B40(1950,0) B41(2000,0) B42(2050,0) B43(2100,0) B44(2150,0) B45(2200,0) B46(2250,0) B47(2300,0) B48(2350,0) B49(2400,0) B52(2550,0) B53(2600,0) B54(2650,0) B55(2700,0) B56(2750,0) B57(2800,0) B58(2850,0) B59(2900,0) B60(2950,0) B61(3000,0) B62(3050,0)
PIC18F14K50-SO [mil]
  rect 78x22.08 smd: 1(-178,225) 2(-178,175) 3(-178,125) 4(-178,75) 5(-178,25) 6(-178,-25) 7(-178,-75) 8(-178,-125) 9(-178,-175) 10(-178,-225) 11(178,-225) 12(178,-175) 13(178,-125) 14(178,-75) 15(178,-25) 16(178,25) 17(178,75) 18(178,125) 19(178,175) 20(178,225)
  silkscreen extent -148,-252 148,252
PQFP208_N [mm] "Shrink QFP, 208-Leads, Body 28x28mm, Pitch 0.5mm, IPC Medium Density"
  oval 1.8x0.3 smd: 1(-14.85,12.75) 2(-14.85,12.25) 3(-14.85,11.75) 4(-14.85,11.25) 5(-14.85,10.75) 6(-14.85,10.25) 7(-14.85,9.75) 8(-14.85,9.25) 9(-14.85,8.75) 10(-14.85,8.25) 11(-14.85,7.75) 12(-14.85,7.25) 13(-14.85,6.75) 14(-14.85,6.25) 15(-14.85,5.75) 16(-14.85,5.25) 17(-14.85,4.75) 18(-14.85,4.25) 19(-14.85,3.75) 20(-14.85,3.25) 21(-14.85,2.75) 22(-14.85,2.25) 23(-14.85,1.75) 24(-14.85,1.25) 25(-14.85,0.75) 26(-14.85,0.25) 27(-14.85,-0.25) 28(-14.85,-0.75) 29(-14.85,-1.25) 30(-14.85,-1.75) 31(-14.85,-2.25) 32(-14.85,-2.75) 33(-14.85,-3.25) 34(-14.85,-3.75) 35(-14.85,-4.25) 36(-14.85,-4.75) 37(-14.85,-5.25) 38(-14.85,-5.75) 39(-14.85,-6.25) 40(-14.85,-6.75) 41(-14.85,-7.25) 42(-14.85,-7.75) 43(-14.85,-8.25) 44(-14.85,-8.75) 45(-14.85,-9.25) 46(-14.85,-9.75) 47(-14.85,-10.25) 48(-14.85,-10.75) 49(-14.85,-11.25) 50(-14.85,-11.75) 51(-14.85,-12.25) 52(-14.85,-12.75) 105(14.85,-12.75) 106(14.85,-12.25) 107(14.85,-11.75) 108(14.85,-11.25) 109(14.85,-10.75) 110(14.85,-10.25) 111(14.85,-9.75) 112(14.85,-9.25) 113(14.85,-8.75) 114(14.85,-8.25) 115(14.85,-7.75) 116(14.85,-7.25) 117(14.85,-6.75) 118(14.85,-6.25) 119(14.85,-5.75) 120(14.85,-5.25) 121(14.85,-4.75) 122(14.85,-4.25) 123(14.85,-3.75) 124(14.85,-3.25) 125(14.85,-2.75) 126(14.85,-2.25) 127(14.85,-1.75) 128(14.85,-1.25) 129(14.85,-0.75) 130(14.85,-0.25) 131(14.85,0.25) 132(14.85,0.75) 133(14.85,1.25) 134(14.85,1.75) 135(14.85,2.25) 136(14.85,2.75) 137(14.85,3.25) 138(14.85,3.75) 139(14.85,4.25) 140(14.85,4.75) 141(14.85,5.25) 142(14.85,5.75) 143(14.85,6.25) 144(14.85,6.75) 145(14.85,7.25) 146(14.85,7.75) 147(14.85,8.25) 148(14.85,8.75) 149(14.85,9.25) 150(14.85,9.75) 151(14.85,10.25) 152(14.85,10.75) 153(14.85,11.25) 154(14.85,11.75) 155(14.85,12.25) 156(14.85,12.75)
  oval 0.3x1.8 smd: 53(-12.75,-14.85) 54(-12.25,-14.85) 55(-11.75,-14.85) 56(-11.25,-14.85) 57(-10.75,-14.85) 58(-10.25,-14.85) 59(-9.75,-14.85) 60(-9.25,-14.85) 61(-8.75,-14.85) 62(-8.25,-14.85) 63(-7.75,-14.85) 64(-7.25,-14.85) 65(-6.75,-14.85) 66(-6.25,-14.85) 67(-5.75,-14.85) 68(-5.25,-14.85) 69(-4.75,-14.85) 70(-4.25,-14.85) 71(-3.75,-14.85) 72(-3.25,-14.85) 73(-2.75,-14.85) 74(-2.25,-14.85) 75(-1.75,-14.85) 76(-1.25,-14.85) 77(-0.75,-14.85) 78(-0.25,-14.85) 79(0.25,-14.85) 80(0.75,-14.85) 81(1.25,-14.85) 82(1.75,-14.85) 83(2.25,-14.85) 84(2.75,-14.85) 85(3.25,-14.85) 86(3.75,-14.85) 87(4.25,-14.85) 88(4.75,-14.85) 89(5.25,-14.85) 90(5.75,-14.85) 91(6.25,-14.85) 92(6.75,-14.85) 93(7.25,-14.85) 94(7.75,-14.85) 95(8.25,-14.85) 96(8.75,-14.85) 97(9.25,-14.85) 98(9.75,-14.85) 99(10.25,-14.85) 100(10.75,-14.85) 101(11.25,-14.85) 102(11.75,-14.85) 103(12.25,-14.85) 104(12.75,-14.85) 157(12.75,14.85) 158(12.25,14.85) 159(11.75,14.85) 160(11.25,14.85) 161(10.75,14.85) 162(10.25,14.85) 163(9.75,14.85) 164(9.25,14.85) 165(8.75,14.85) 166(8.25,14.85) 167(7.75,14.85) 168(7.25,14.85) 169(6.75,14.85) 170(6.25,14.85) 171(5.75,14.85) 172(5.25,14.85) 173(4.75,14.85) 174(4.25,14.85) 175(3.75,14.85) 176(3.25,14.85) 177(2.75,14.85) 178(2.25,14.85) 179(1.75,14.85) 180(1.25,14.85) 181(0.75,14.85) 182(0.25,14.85) 183(-0.25,14.85) 184(-0.75,14.85) 185(-1.25,14.85) 186(-1.75,14.85) 187(-2.25,14.85) 188(-2.75,14.85) 189(-3.25,14.85) 190(-3.75,14.85) 191(-4.25,14.85) 192(-4.75,14.85) 193(-5.25,14.85) 194(-5.75,14.85) 195(-6.25,14.85) 196(-6.75,14.85) 197(-7.25,14.85) 198(-7.75,14.85) 199(-8.25,14.85) 200(-8.75,14.85) 201(-9.25,14.85) 202(-9.75,14.85) 203(-10.25,14.85) 204(-10.75,14.85) 205(-11.25,14.85) 206(-11.75,14.85) 207(-12.25,14.85) 208(-12.75,14.85)
  silkscreen extent -14.97,-13.55 13.55,13.57, body extent -14,-14 14,14, height 4.1
RESC1608N [mm] "Chip Resistor, Body 1.6x0.8mm, IPC Medium Density"
  rect 0.9x1 smd: 1(-0.85,0) 2(0.85,0)
  TopLayer pour cut-out: 0.7,0.5 0.7,-0.5 -0.7,-0.5 -0.7,0.5
  silkscreen extent -0.2,-0.4 0.2,0.4, body extent -0.85,-0.48 0.85,0.48, height 0.6
RESC2012N [mm] "Chip Resistor, Body 2.0x1.3mm, IPC Medium Density"
  rect 1.2x1.4 smd: 1(-0.9,0) 2(0.9,0)
  TopLayer pour cut-out: 0.8,0.7 0.8,-0.7 -0.9,-0.7 -0.9,0.7
  silkscreen extent -0.1,-0.7 0.1,0.7, body extent -1.07,-0.7 1.07,0.7, height 0.65
SCP10GR31/RH [mm]
  rect 1.5x1.5 hole 0.9: 1(5.08,1.27)
  round 1.5 hole 0.9: 2(5.08,-1.27) 3(2.54,1.27) 4(2.54,-1.27) 5(0,1.27) 6(0,-1.27) 7(-2.54,1.27) 8(-2.54,-1.27) 9(-5.08,1.27) 10(-5.08,-1.27)
  silkscreen extent -10.15,-11.87 10.15,-3.07
SCP10GS31/RH [mm]
  rect 1.5x1.5 hole 1: 1(0,0)
  round 1.5 hole 1: 2(0,2.54) 3(2.54,0) 4(2.54,2.54) 5(5.08,0) 6(5.08,2.54) 7(7.62,0) 8(7.62,2.54) 9(10.16,0) 10(10.16,2.54)
  silkscreen extent -5.08,-3.11 15.24,5.65
SCP20GR31/RH [mm]
  rect 1.5x1.5 hole 0.9: 1(11.43,1.27)
  round 1.5 hole 0.9: 2(11.43,-1.27) 3(8.89,1.27) 4(8.89,-1.27) 5(6.35,1.27) 6(6.35,-1.27) 7(3.81,1.27) 8(3.81,-1.27) 9(1.27,1.27) 10(1.27,-1.27) 11(-1.27,1.27) 12(-1.27,-1.27) 13(-3.81,1.27) 14(-3.81,-1.27) 15(-6.35,1.27) 16(-6.35,-1.27) 17(-8.89,1.27) 18(-8.89,-1.27) 19(-11.43,1.27) 20(-11.43,-1.27)
  silkscreen extent -16.5,-11.87 16.5,-3.07
SLIDE_SW_2TYPE [mm]
  oval 1.65x2.25 hole 0.9 slot 1.5 at 90 deg: 0(-5.85,0) 0(5.85,0)
  rect 1.65x1.65 hole 1: 1(-3,0)
  round 1.65 hole 1: 2(0,0) 3(3,0)
  silkscreen extent -7,-3 7,3
SOD80C [mm] "Metal Electrode Face (MELF) Diode; Body 3.5 x 1.6 mm (LxDia)"
  rect 1.25x1.7 smd: 1(-1.775,0) 2(1.775,0)
  silkscreen extent -2.8,-1.3 2.9,1.3
SOD-123 [mm] "SOD-123; 2 Leads; Body 2.7 x 1.6 mm, (LxW)"
  rect 1.2x1.3 smd: 1(-1.7,0) 2(1.7,0)
  silkscreen extent -2.7,-1.1 2.8,1.1
SOIC8_L [mm] "SOIC, 8-Leads, Body 4.9x3.9mm, Pitch 1.27mm, IPC High Density"
  oval 1.9x0.6 smd: 1(-2.35,1.905) 2(-2.35,0.635) 3(-2.35,-0.635) 4(-2.35,-1.905) 5(2.35,-1.905) 6(2.35,-0.635) 7(2.35,0.635) 8(2.35,1.905)
  silkscreen extent -2.47,-2.5 1,2.88, body extent -1.95,-2.45 1.95,2.45, height 1.75
"TACK_SW 6x6mm" [mm]
  rect 1.65x1.65 hole 1: 1(0,0)
  round 1.65 hole 1: 2(6.5,0) 3(0,4.5) 4(6.5,4.5)
  silkscreen extent -0.75,-1.87 7.25,5.65
TSOP2-54_M [mm] "SOP, 54-Leads, Body 22.2x10.16mm, Pitch 0.8mm, IPC Low Density"
  oval 1.8x0.6 smd: 1(-5.7,10.4) 2(-5.7,9.6) 3(-5.7,8.8) 4(-5.7,8) 5(-5.7,7.2) 6(-5.7,6.4) 7(-5.7,5.6) 8(-5.7,4.8) 9(-5.7,4) 10(-5.7,3.2) 11(-5.7,2.4) 12(-5.7,1.6) 13(-5.7,0.8) 14(-5.7,0) 15(-5.7,-0.8) 16(-5.7,-1.6) 17(-5.7,-2.4) 18(-5.7,-3.2) 19(-5.7,-4) 20(-5.7,-4.8) 21(-5.7,-5.6) 22(-5.7,-6.4) 23(-5.7,-7.2) 24(-5.7,-8) 25(-5.7,-8.8) 26(-5.7,-9.6) 27(-5.7,-10.4) 28(5.7,-10.4) 29(5.7,-9.6) 30(5.7,-8.8) 31(5.7,-8) 32(5.7,-7.2) 33(5.7,-6.4) 34(5.7,-5.6) 35(5.7,-4.8) 36(5.7,-4) 37(5.7,-3.2) 38(5.7,-2.4) 39(5.7,-1.6) 40(5.7,-0.8) 41(5.7,0) 42(5.7,0.8) 43(5.7,1.6) 44(5.7,2.4) 45(5.7,3.2) 46(5.7,4) 47(5.7,4.8) 48(5.7,5.6) 49(5.7,6.4) 50(5.7,7.2) 51(5.7,8) 52(5.7,8.8) 53(5.7,9.6) 54(5.7,10.4)
  silkscreen extent -5.82,-11.15 4.4,11.37, body extent -5.08,-11.11 5.08,11.11, height 1.2
TSSOP24(QS3681) [mm] "Shrink Small Outline; 24 Leads; Body Width 4.4 mm; Pitch 0.65 mm"
  rect 0.3x1.6 smd: 1(-3.575,-2.8) 2(-2.925,-2.8) 3(-2.275,-2.8) 4(-1.625,-2.8) 5(-0.975,-2.8) 6(-0.325,-2.8) 7(0.325,-2.8) 8(0.975,-2.8) 9(1.625,-2.8) 10(2.275,-2.8) 11(2.925,-2.8) 12(3.575,-2.8) 13(3.575,2.8) 14(2.925,2.8) 15(2.275,2.8) 16(1.625,2.8) 17(0.975,2.8) 18(0.325,2.8) 19(-0.325,2.8) 20(-0.975,2.8) 21(-1.625,2.8) 22(-2.275,2.8) 23(-2.925,2.8) 24(-3.575,2.8)
  silkscreen extent -4.4,-2.92 4,1.6

## Part data
C1 C2 C3 C4 C5 C6 C7 C8 C9 C10 C11 C13 C14 C15 C16 C17 C18 C19 C20 C21 C22 C23 C24 C25 C26 C27 C28 C29 C30 C32 C33 C34 C35 C37 C38 C39 C42 C43 C44 C45 C47 C48 C49 C50 C51 C52 C53 C54 C55 C56 C57 C58 C59 C60 C61 C62 C63 C64 C65 C66 C67 C68 C69 C70 C71 C72 C73 C74: "Capacitor (Semiconductor SIM Model)"
C12 C31 C36 C40 C41 C46 C75: "NICHICON"
CN1 CN2 CN3 CN5 CN7: "GTK"
CN4: library part 4-1437106-7, "GTK"
CN8: "Dsub-15 High density VGA Female connetor"
CN9: library part "D Connector 9", "GTK"
D1: library part "D Schottky", "Schottky Diode"
D2: library part "D Schottky", "ON SEMI"
D3: library part BAS32L, "TAIWAN SEMICONDUCTOR"
J1: library part "Header 10X2", "Header, 10-Pin, Dual row"
J2: library part "Header 5X2", "Header, 5-Pin, Dual row"
J3: library part "Header 5", "Header, 5-Pin"
J5: "Header, 3-Pin"
J6: library part JACK2.5mm, "WEALTH METAL"
LED1 LED2 LED3 LED4 LED5 LED6 LED7 LED8 LED9 LED12: "OASISTEK (TO-3216BC-MAE)"
LED10 LED11: "Typical RED, GREEN, YELLOW, AMBER GaAs LED"
P1: library part PCIUV32BIT, "Card, 116-Position"
R1 R2 R3 R4 R5 R6 R7 R8 R9 R10 R11 R12 R13 R14 R15 R16 R17 R18 R19 R20 R21 R22 R23 R24 R25 R26 R27 R28 R29 R30 R31 R32 R33 R34 R35 R36 R37 R38 R39 R40 R41 R42 R43 R44 R45 R46 R47 R48 R49 R50 R51 R52 R53 R54 R55 R56 R57 R58 R59 R60: "Resistor"
S1 S2 S3 S4 S9: library part SW-SPDT, "WEALTH METAL"
S5 S6 S7 S8: "WEALTH METAL"
U1 U2 U3: "MICROCHIPS"
U4: library part PIC18F14K50, "MICROCHIPS"
U5 U7 U9 U11 U12: library part QS3861, "IDT"
U6 U13: "ALTERA EPCS1 Series, In-system programmable 3.3V serial configuration device, 8-Pin SOIC, 1-Megabit, Industrial Grade"
U8: "ALTERA Cyclone II Family, 1.2V FPGA, 142 I/O Pins, 2 PLLs, 208-Pin PQFP, Speed Grade 8, Commercial Grade"
U10: "MICRON"
U14 U16: "ON SEMI"
U15: library part MAX3232CSE, "INTERSIL"
X1: library part ABLS-25.000MHZ-B2F-T, "MEC"
X2: "CONNOR-WINFIELD"

## Free pads (board coordinates)
  round 1.27 hole 3.175: 1(162.052,7.239) 2(132.7,92.6) 3(0,85.395) 4(0,0)
  rect 3x3 on Top Solder: 2(4.5,7.2) 2(4.5,89.7) 2(155.1,88)
  rect 3x3 on Bottom Solder: 2(4.5,7.2) 2(4.5,89.7) 2(155.1,88)
  round 1.5 on Top Solder: 2(65,23.8) 2(94.1,52.8)

## Via types
v1: diameter 0.7, hole 0.4, TopLayer to BottomLayer, 476 vias
v2: diameter 0.8, hole 0.5, TopLayer to BottomLayer, 34 vias

## Nets (pads, with @x,y where several pads share a name; then routed paths per layer and width w, separated by ;. In a path a pad name is that pad's centre, name@x,y a point inside that pad or via, vN(x,y) a via of type N, cw(c..) or ccw(c..) an arc to the next point about the centre after c; other vN are vias at no path point)
1_2V: C31.1 C35.2 C48.2 C52.2 C53.2 C57.2 C59.2 C61.2 C62.2 C68.2 C69.2 C73.2 R45.1 TP2.1 U8.51 U8.53 U8.66 U8.79 U8.155 U8.157 U8.178 U8.190 U14.4 | length 265.4
  TopLayer w0.2: 109.4,16.9 109.4,22.5 110.1,23.2 114.5,23.2 115.3,22.4 115.3,19.8 117,18.1 124.6,18.1 125.1,18.6 125.1,22.2 126.3,22.2 126.3,16.2 125.3,15.2 111.1,15.2 109.4,16.9
  TopLayer w0.3: U8.51@64.7,26.05 66.75,26.05 v1(66.8,26.1) ; U8.53@66.85,23.4 66.85,24.95 v1(67.3,25.4) ; U8.66@73.35,23.4 73.35,25.35 v1(73.4,25.4) ; v1@75.85,51.15 v1(75.9,51.2) 75.85,51.25 U8.190@75.85,53.15 ; U8.79@79.85,23.45 v1@79.85,25.35 ; v1@81.85,51.15 v1@81.9,51.1 ; U8.178@81.85,53.15 81.85,51.25 v1(81.9,51.2) ; v1(92.1,51.2) 92.35,51.45 U8.157@92.35,53.2 ; v1(92.5,50.5) 92.55,50.55 U8.155@94.5,50.55
  TopLayer w1: 122.5,17.6 124.8,17.6 ; 124.6,17.4 125.7,18.5 ; U14.4@125.5,21.8 U14.4@125.9,21.8 ; 125.7,17.7 U14.4@125.7,21.8
  MidLayer3 w0.2: 65.9,22.374 97.226,22.374 101.6,18 114.4,18 114.4,23 108.8,23 104.963,26.838 87.4,26.838 87.4,45.7 93.5,45.7 93.5,52 65.9,52 65.9,22.374
  BottomLayer w0.2: C61.2@81.5,24.9 C61.2@81.5,25.7 ; 112.5,18.9 v2(112.5,19.5)
  BottomLayer w0.5: C48.2@66.65,27.3 66.65,26.25 v1(66.8,26.1) ; v1(67.3,25.4) 68.45,25.4 C52.2@68.5,25.35 C53.2@70,25.35 ; v1(73.4,25.4) C57.2@74.55,25.4 ; v1(75.9,51.2) C59.2@76.95,51.2 ; v1(79.8,25.4) C61.2@80.95,25.4 ; C62.2@80.75,51.2 v1(81.9,51.2) ; C68.2@89.3,51.25 C69.2@90.8,51.25 90.85,51.2 v1(92.1,51.2) ; v1(92.5,50.5) 92.5,49.35 C73.2@92.55,49.3
  other v2: 110.5,19.5 110.5,21 112.5,21 110.5,22.5 112.5,22.5
3.3VAUX: P1.A14 | length 2.8
  BottomLayer w0.5: 50.622,-3.131 P1.A14@50.622,-0.381